# Altium PCB MCD_Rev2.PcbDoc (part 1 of 2)
Units mm, origin at the board's own origin, x right, y up, seen from the top; angles counter-clockwise.
Board outline 196.3 x 114.66 mm, 2 copper layers (F.Cu, B.Cu); 76 components, 120 nets, 473 pads, 223 vias.
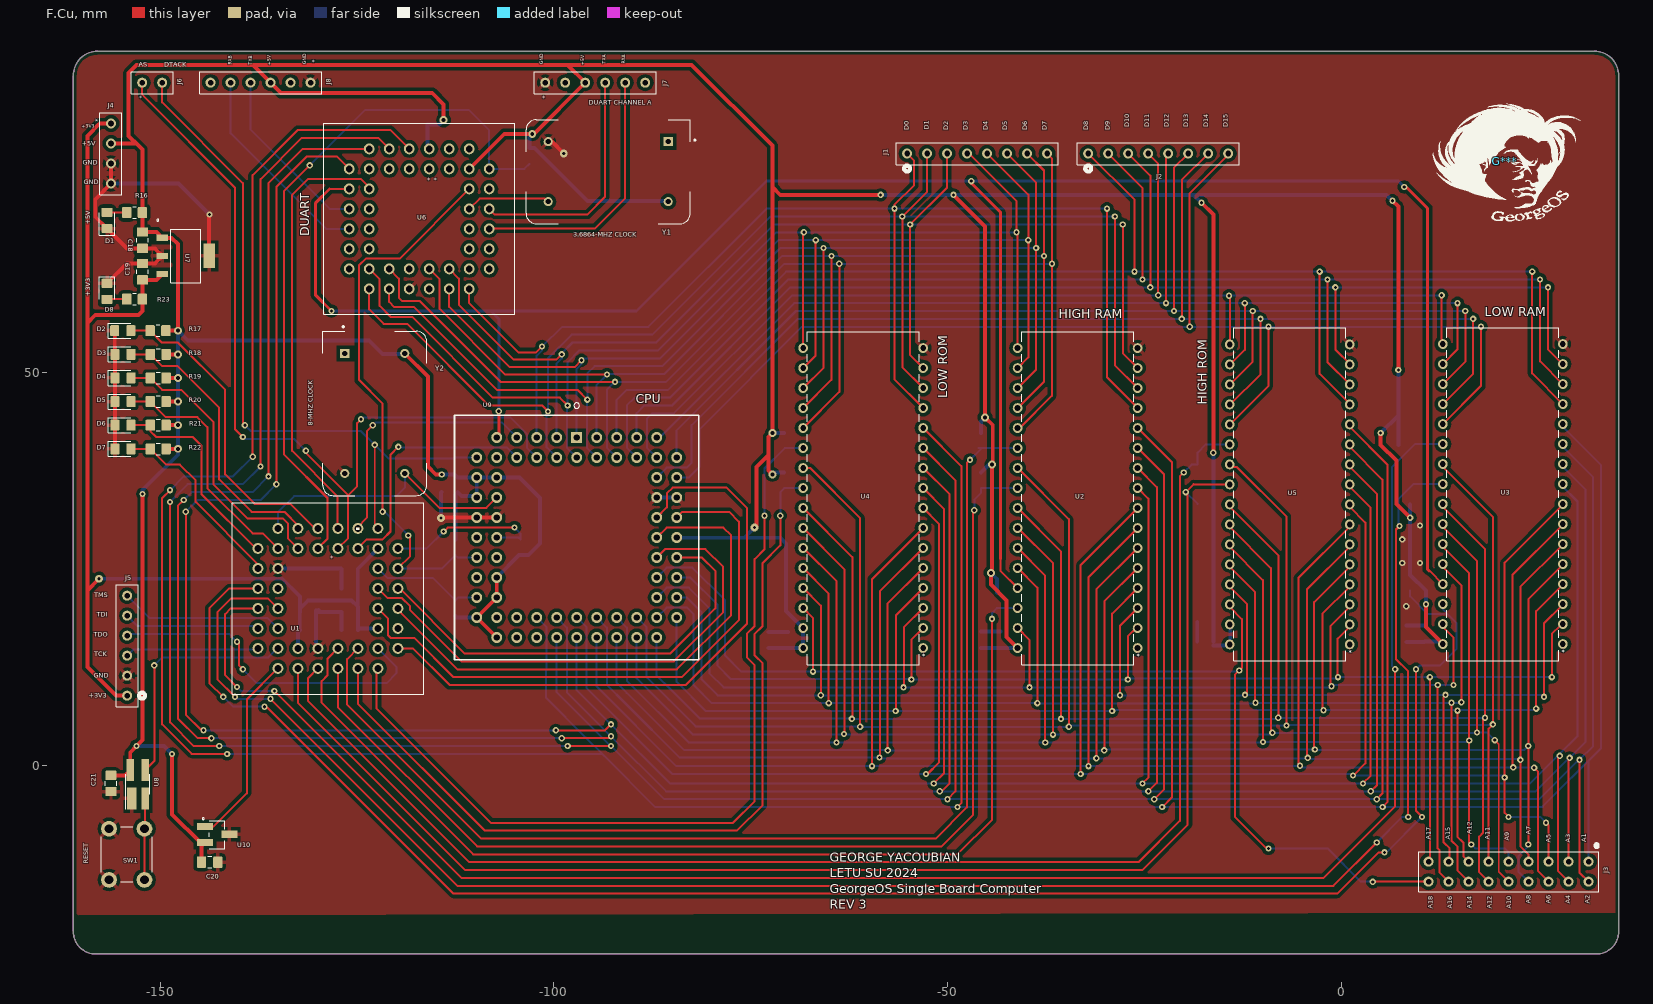
[diagram p0: F.Cu view]
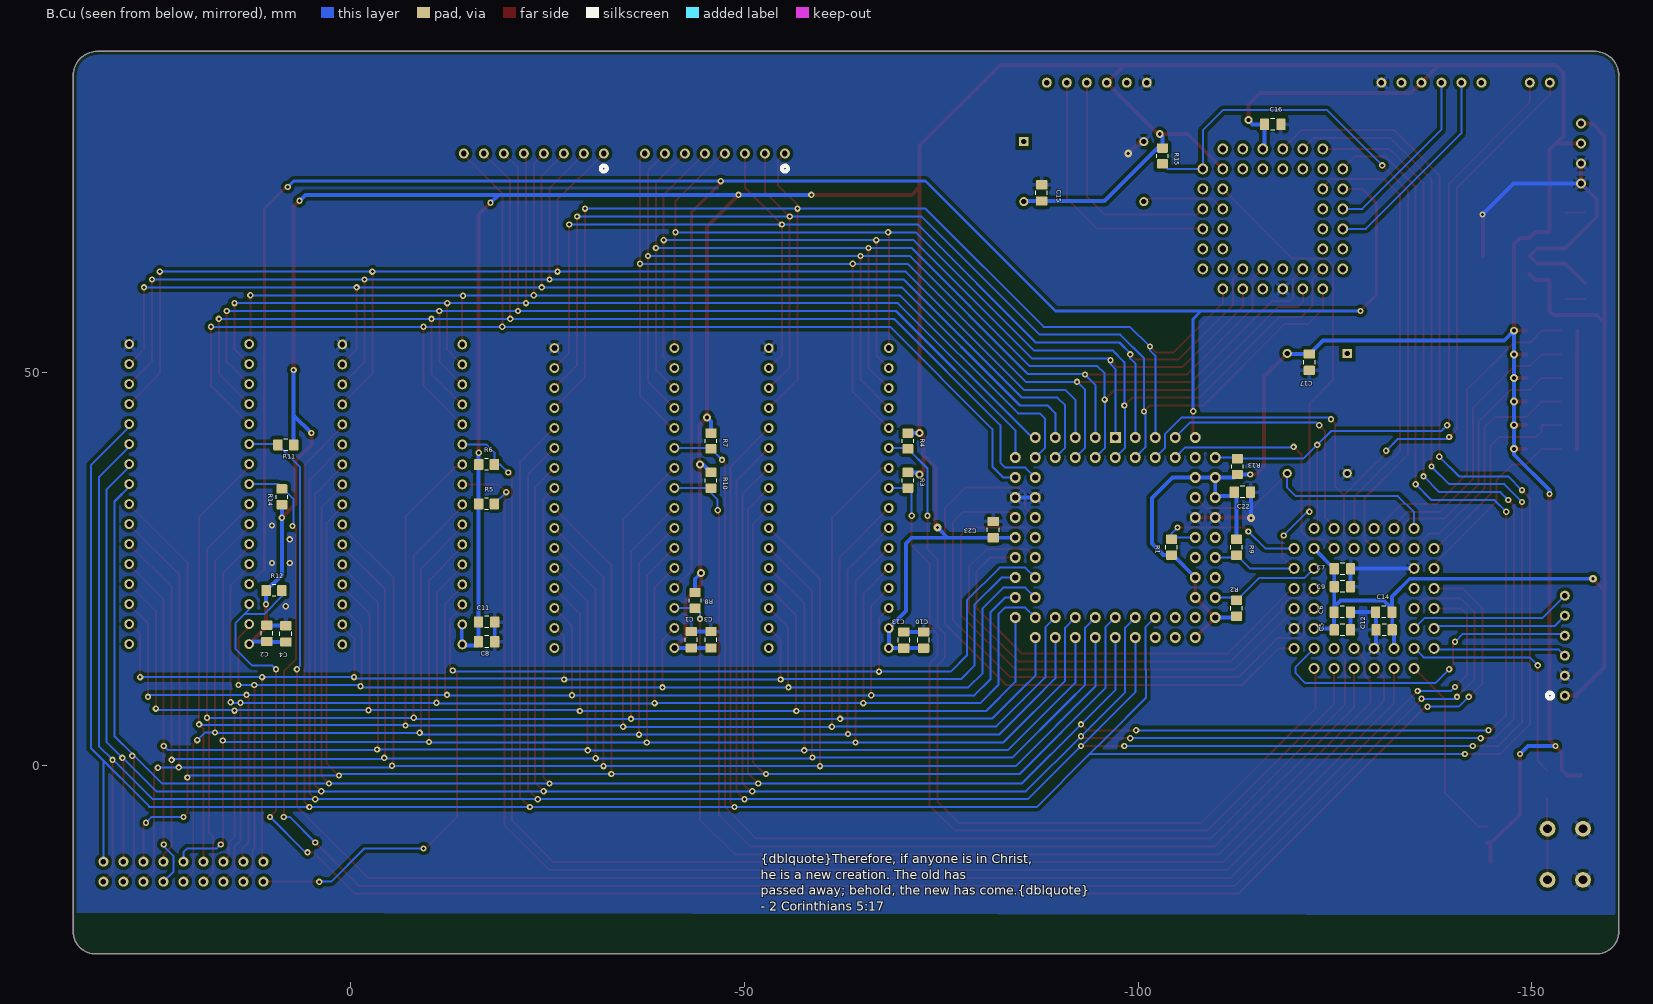
[diagram p1: B.Cu view, seen from below]

## Layer stack, top to bottom
F.Mask: solder mask 0.0102, Solder Resist, Dk 3.5
F.Cu: signal copper 0.0356
Dielectric 1: dielectric 0.32, FR-4, Dk 4.8
B.Cu: signal copper 0.0356
B.Mask: solder mask 0.0102, Solder Resist, Dk 3.5

## Board outline
-161.05,-21.05 ccw(c-158.19,-21.05) -157.95,-23.9 32.15,-23.9 ccw(c32.39,-21.05) 35.25,-21.05 35.25,87.65 ccw(c32.15,87.65) 32.15,90.75 -157.95,90.75 ccw(c-157.95,87.65) -161.05,-21.05

## Design rules (kind name [scope] priority, off if disabled: settings)
Clearance "Clearence 0.42_Polygon" [InNamedPolygon('F.Cu-GND') OR InNamedPolygon('B.Cu-GND')] p1: gap=0.42 ignorepadtopadclearanceinfootprint=FALSE
MinimumSolderMaskSliver [All] p1: minsoldermaskwidth=0
PolygonConnect Polygon_B.Cu-GND_ConnectDirect [IsNamedPolygon('B.Cu-GND') vs IsVia] p1: connectstyle=Direct reliefconductorwidth=0.254 reliefentries=4 polygonreliefangle="90 Angle" airgapwidth=0.254
PolygonConnect Polygon_B.Cu-GND_ConnectRelief45 [IsNamedPolygon('B.Cu-GND') vs (IsThruPin or IsSMTPin) and (PadShape_AllLayers = 'Round')] p2: connectstyle=Relief reliefconductorwidth=0.5 reliefentries=4 polygonreliefangle="45 Angle" airgapwidth=0.4
PolygonConnect Polygon_B.Cu-GND_ConnectRelief90 [IsNamedPolygon('B.Cu-GND') vs (IsThruPin or IsSMTPin) and (PadShape_AllLayers <> 'Round')] p3: connectstyle=Relief reliefconductorwidth=0.5 reliefentries=4 polygonreliefangle="90 Angle" airgapwidth=0.4
PolygonConnect Polygon_F.Cu-GND_ConnectDirect [IsNamedPolygon('F.Cu-GND') vs IsVia] p4: connectstyle=Direct reliefconductorwidth=0.254 reliefentries=4 polygonreliefangle="90 Angle" airgapwidth=0.254
PolygonConnect Polygon_F.Cu-GND_ConnectRelief45 [IsNamedPolygon('F.Cu-GND') vs (IsThruPin or IsSMTPin) and (PadShape_AllLayers = 'Round')] p5: connectstyle=Relief reliefconductorwidth=0.5 reliefentries=4 polygonreliefangle="45 Angle" airgapwidth=0.4
PolygonConnect Polygon_F.Cu-GND_ConnectRelief90 [IsNamedPolygon('F.Cu-GND') vs (IsThruPin or IsSMTPin) and (PadShape_AllLayers <> 'Round')] p6: connectstyle=Relief reliefconductorwidth=0.5 reliefentries=4 polygonreliefangle="90 Angle" airgapwidth=0.4
RoutingVias [All] p1: holewidth=0.711 width=1.27 viastyle="Through Hole" minholewidth=0.711 minwidth=1.27 maxholewidth=0.711 maxwidth=1.27
SilkToSilkClearance [All] p1: silktosilkclearance=0
SilkToSolderMaskClearance [IsPad] p1: minsilkscreentomaskgap=0 clearancetoexposedcopper=TRUE
SolderMaskExpansion [All] p1: expansion=0.102 istentingtop=FALSE
Width [All] p1: maxlimit=10 minlimit=0.254 preferedwidth=0.254 minimp=50.000000 maximp=50.000000 favimp=50.000000
27 further rules are at their usual default settings.

## Components (designator, comment, footprint, x,y, rotation, side; value= is the part's Value field where it differs from the comment)
C1 "0u1" C_0805_2012Metric_Pad1.18x1.45mm_HandSolder#1 -43.25,16 r270 bottom
C2 "0u1" C_0805_2012Metric_Pad1.18x1.45mm_HandSolder#1 10.65,16.813 r270 bottom
C3 "0u01" C_0805_2012Metric_Pad1.18x1.45mm_HandSolder#1 -45.75,16 r270 bottom
C4 "0u01" C_0805_2012Metric_Pad1.18x1.45mm_HandSolder#1 8.25,16.75 r270 bottom
C5 "0u01" C_0805_2012Metric_Pad1.18x1.45mm_HandSolder#1 -125.95,17.25 r0 bottom
C6 "0u1" C_0805_2012Metric_Pad1.18x1.45mm_HandSolder#1 -125.928,19.5 r0 bottom
C7 "0u01" C_0805_2012Metric_Pad1.18x1.45mm_HandSolder#1 -125.95,25 r0 bottom
C8 "0u1" C_0805_2012Metric_Pad1.18x1.45mm_HandSolder#1 -17.25,15.75 r0 bottom
C9 "0u1" C_0805_2012Metric_Pad1.18x1.45mm_HandSolder#1 -125.95,22.75 r0 bottom
C10 "0u1" C_0805_2012Metric_Pad1.18x1.45mm_HandSolder#1 -72.75,15.963 r270 bottom
C11 "0u01" C_0805_2012Metric_Pad1.18x1.45mm_HandSolder#1 -17.25,18.25 r0 bottom
C12 "0u01" C_0805_2012Metric_Pad1.18x1.45mm_HandSolder#1 -131.237,17.25 r180 bottom
C13 "0u01" C_0805_2012Metric_Pad1.18x1.45mm_HandSolder#1 -70.25,15.963 r270 bottom
C14 "0u1" C_0805_2012Metric_Pad1.18x1.45mm_HandSolder#1 -131.2,19.5 r180 bottom
C15 "0u1" C_0805_2012Metric_Pad1.18x1.45mm_HandSolder#1 -87.75,72.75 r270 bottom
C16 "0u1" C_0805_2012Metric_Pad1.18x1.45mm_HandSolder#1 -117.1,81.45 r0 bottom
C17 "0u1" C_0805_2012Metric_Pad1.18x1.45mm_HandSolder#1 -121.75,51.25 r90 bottom
C18 "4u7" C_0805_2012Metric_Pad1.18x1.45mm_HandSolder#2 -152.25,66.75 r270 top
C19 "4u7" C_0805_2012Metric_Pad1.18x1.45mm_HandSolder#2 -152.25,62.75 r90 top
C20 "0u1" C_0805_2012Metric_Pad1.18x1.45mm_HandSolder#2 -143.712,-12.25 r0 top
C21 "0u1" C_0805_2012Metric_Pad1.18x1.45mm_HandSolder#2 -156.25,-2.25 r270 top
C22 "0u1" C_0805_2012Metric_Pad1.18x1.45mm_HandSolder#1 -113.25,34.75 r0 bottom
C23 "0u1" C_0805_2012Metric_Pad1.18x1.45mm_HandSolder#1 -81.599,29.99 r270 bottom
D1 "LED" LED_0805_2012Metric_Pad1.15x1.40mm_HandSolder -156.75,69.25 r90 top
D2 "LED" LED_0805_2012Metric_Pad1.15x1.40mm_HandSolder -154.75,55.25 r0 top
D3 "LED" LED_0805_2012Metric_Pad1.15x1.40mm_HandSolder -154.725,52.25 r0 top
D4 "LED" LED_0805_2012Metric_Pad1.15x1.40mm_HandSolder -154.725,49.25 r0 top
D5 "LED" LED_0805_2012Metric_Pad1.15x1.40mm_HandSolder -154.725,46.25 r0 top
D6 "LED" LED_0805_2012Metric_Pad1.15x1.40mm_HandSolder -154.725,43.25 r0 top
D7 "LED" LED_0805_2012Metric_Pad1.15x1.40mm_HandSolder -154.725,40.25 r0 top
D8 "LED" LED_0805_2012Metric_Pad1.15x1.40mm_HandSolder -156.75,60.25 r270 top
G*** "LOGO" LOGO 20.75,76.75 r0 top
J1 "DBUS_LOW" CON8_1X8_TU_HTS_SAI -46.25,77.75 r0 top
J2 "DBUS_HIGH" CON8_1X8_TU_HTS_SAI -23.25,77.75 r0 top
J3 "ABUS" CON18_2X9_TU_HTS_SAI 21.25,-13.451 r180 top
J4 "POWER" CON4_1X4_TU_HTS_SAI -156.25,77.75 r270 top
J5 "JTAG" CON6_1X6_TU_HTS_SAI -154.2,15.25 r90 top
J6 "Conn_01x02_Male" CON2_1X2_TU_HTS_SAI -151.02,86.75 r0 top
J7 "DUART A" CON6_1X6_TU_HTS_SAI -94.75,86.75 r0 top
J8 "DUART B" CON6_1X6_TU_HTS_SAI -137.25,86.75 r180 top
R1 "4k7" R_0805_2012Metric_Pad1.20x1.40mm_HandSolder#1 -104.25,27.75 r270 bottom
R2 "4k7" R_0805_2012Metric_Pad1.20x1.40mm_HandSolder#1 -112.5,20 r270 bottom
R3 "4k7" R_0805_2012Metric_Pad1.20x1.40mm_HandSolder#1 -70.75,36.25 r90 bottom
R4 "4k7" R_0805_2012Metric_Pad1.20x1.40mm_HandSolder#1 -70.75,41.25 r90 bottom
R5 "4k7" R_0805_2012Metric_Pad1.20x1.40mm_HandSolder#1 -17.25,33.25 r0 bottom
R6 "4k7" R_0805_2012Metric_Pad1.20x1.40mm_HandSolder#1 -17.25,38.25 r0 bottom
R7 "4k7" R_0805_2012Metric_Pad1.20x1.40mm_HandSolder#1 -45.75,41.25 r90 bottom
R8 "4k7" R_0805_2012Metric_Pad1.20x1.40mm_HandSolder#1 -43.75,21 r90 bottom
R9 "4k7" R_0805_2012Metric_Pad1.20x1.40mm_HandSolder#1 -112.5,27.75 r90 bottom
R10 "4k7" R_0805_2012Metric_Pad1.20x1.40mm_HandSolder#1 -45.75,36.25 r90 bottom
R11 "4k7" R_0805_2012Metric_Pad1.20x1.40mm_HandSolder#1 8.25,40.75 r180 bottom
R12 "4k7" R_0805_2012Metric_Pad1.20x1.40mm_HandSolder#1 9.75,22.25 r0 bottom
R13 "4k7" R_0805_2012Metric_Pad1.20x1.40mm_HandSolder#1 -112.599,37.99 r270 bottom
R14 "4k7" R_0805_2012Metric_Pad1.20x1.40mm_HandSolder#1 8.75,34.15 r270 bottom
R15 "4k7" R_0805_2012Metric_Pad1.20x1.40mm_HandSolder#1 -103.1,77.45 r90 bottom
R16 "1k" R_0805_2012Metric_Pad1.20x1.40mm_HandSolder#2 -153.25,70.25 r180 top
R17 "1k" R_0805_2012Metric_Pad1.20x1.40mm_HandSolder#2 -150.275,55.25 r180 top
R18 "1k" R_0805_2012Metric_Pad1.20x1.40mm_HandSolder#2 -150.25,52.25 r180 top
R19 "1k" R_0805_2012Metric_Pad1.20x1.40mm_HandSolder#2 -150.25,49.25 r180 top
R20 "1k" R_0805_2012Metric_Pad1.20x1.40mm_HandSolder#2 -150.25,46.25 r180 top
R21 "1k" R_0805_2012Metric_Pad1.20x1.40mm_HandSolder#2 -150.25,43.25 r180 top
R22 "1k" R_0805_2012Metric_Pad1.20x1.40mm_HandSolder#2 -150.25,40.25 r180 top
R23 "1k" R_0805_2012Metric_Pad1.20x1.40mm_HandSolder#2 -153.25,59.25 r180 top
SW1 "SW_Push" SW_PUSH_6mm -156.5,-14.5 r90 top
U1 "XC9572XL-PC44" TO_11B1-RK-TP_3MM -127.43,27.6 r0 top
U2 "AS6C1008-55PCN" PDIP32_PH_SST_MCH -25.86,14.95 r180 top
U3 "AS6C1008-55PCN" PDIP32_PH_SST_MCH 28.14,15.45 r180 top
U4 "SST39SF020A-70-4C-PHE" PDIP32_PH_SST_MCH -53.1,14.95 r180 top
U5 "SST39SF020A-70-4C-PHE" PDIP32_PH_SST_MCH 1.07,15.41 r180 top
U6 "XR68C681CJ-F" TO_11B1-RK-TP_3MM -115.83,75.8 r0 top
U7 "AP2114HA-3.3TRG1" SOT-223_DIO-L -146.75,64.75 r270 top
U8 "MAX6816EUS_T" SOT-143_Handsoldering -152.85,-2.35 r90 top
U9 "MC68000FN" 3M_8468-11B1-RK-TP -97.099,28.99 r0 top
U10 "STM1001LWX6F" SOT-23_STM-L -142.75,-8.75 r270 top
Y1 "ECS-100AX-036" OSC_ECS-100AX-036 -93.1,75.45 r180 top
Y2 "ECS-100AX-080" OSC_ECS-100AX-080 -122.75,44.75 r270 top

## Footprints (in the part's own frame and the unit in brackets; to place one, negate y for a bottom-side part, rotate by r counter-clockwise, add the part's x,y. Pads: shape width x height; smd on the part's side, far side on the other; paste and mask are expansions set on the pad)
3M_8468-11B1-RK-TP [mm]
  rect 1.4x1.4 hole 0.8 paste-2539.97 mask+0.102: 1(0,12.7)
  round 1.4 hole 0.8 paste-2539.97 mask+0.102: 2(0,10.16) 3(-2.54,12.7) 4(-2.54,10.16) 5(-5.08,12.7) 6(-5.08,10.16) 7(-7.62,12.7) 8(-7.62,10.16) 9(-10.16,12.7) 10(-12.7,10.16) 11(-10.16,10.16) 12(-12.7,7.62) 13(-10.16,7.62) 14(-12.7,5.08) 15(-10.16,5.08) 16(-12.7,2.54) 17(-10.16,2.54) 18(-12.7,0) 19(-10.16,0) 20(-12.7,-2.54) 21(-10.16,-2.54) 22(-12.7,-5.08) 23(-10.16,-5.08) 24(-12.7,-7.62) 25(-10.16,-7.62) 26(-12.7,-10.16) 27(-10.16,-12.7) 28(-10.16,-10.16) 29(-7.62,-12.7) 30(-7.62,-10.16) 31(-5.08,-12.7) 32(-5.08,-10.16) 33(-2.54,-12.7) 34(-2.54,-10.16) 35(0,-12.7) 36(0,-10.16) 37(2.54,-12.7) 38(2.54,-10.16) 39(5.08,-12.7) 40(5.08,-10.16) 41(7.62,-12.7) 42(7.62,-10.16) 43(10.16,-12.7) 44(12.7,-10.16) 45(10.16,-10.16) 46(12.7,-7.62) 47(10.16,-7.62) 48(12.7,-5.08) 49(10.16,-5.08) 50(12.7,-2.54) 51(10.16,-2.54) 52(12.7,0) 53(10.16,0) 54(12.7,2.54) 55(10.16,2.54) 56(12.7,5.08) 57(10.16,5.08) 58(12.7,7.62) 59(10.16,7.62) 60(12.7,10.16) 61(10.16,12.7) 62(10.16,10.16) 63(7.62,12.7) 64(7.62,10.16) 65(5.08,12.7) 66(5.08,10.16) 67(2.54,12.7) 68(2.54,10.16)
  silkscreen extent -15.53,-15.53 15.53,17.1
C_0805_2012Metric_Pad1.18x1.45mm_HandSolder#1 [mm]
  rrect21% 1.175x1.45 smd mask+0: 1(1.038,0) 2(-1.038,0)
  silkscreen extent -0.26,-0.73 0.26,0.73
C_0805_2012Metric_Pad1.18x1.45mm_HandSolder#2 [mm]
  rrect21% 1.175x1.45 smd mask+0: 1(-1.038,0) 2(1.038,0)
  silkscreen extent -0.26,-0.73 0.26,0.73
CON2_1X2_TU_HTS_SAI [mil]
  round 50 hole 28 paste-99999 mask+0: 1(-50,0) 2(50,0)
  silkscreen extent -105,-55 105,55
CON4_1X4_TU_HTS_SAI [mil]
  round 50 hole 28 paste-99999 mask+0: 1(-150,0) 2(-50,0) 3(50,0) 4(150,0)
  silkscreen extent -205,-55 205,55
CON6_1X6_TU_HTS_SAI [mil]
  round 50 hole 28 paste-99999 mask+0: 1(-250,0) 2(-150,0) 3(-50,0) 4(50,0) 5(150,0) 6(250,0)
  silkscreen extent -305,-90 305,55
CON8_1X8_TU_HTS_SAI [mil]
  round 50 hole 28 paste-99999 mask+0: 1(-350,0) 2(-250,0) 3(-150,0) 4(-50,0) 5(50,0) 6(150,0) 7(250,0) 8(350,0)
  silkscreen extent -405,-90 405,55
CON18_2X9_TU_HTS_SAI [mil]
  round 50 hole 28 paste-99999 mask+0: 1(-400,-50) 2(-400,50) 3(-300,-50) 4(-300,50) 5(-200,-50) 6(-200,50) 7(-100,-50) 8(-100,50) 9(0,-50) 10(0,50) 11(100,-50) 12(100,50) 13(200,-50) 14(200,50) 15(300,-50) 16(300,50) 17(400,-50) 18(400,50)
  silkscreen extent -454,-144 450,100
LED_0805_2012Metric_Pad1.15x1.40mm_HandSolder [mm]
  rrect22% 1.15x1.4 smd mask+0: 1(-1.025,0) 2(1.025,0)
  silkscreen extent -1.86,-0.96 1,0.96
LOGO [mm]
  silkscreen extent -9.12,-7.62 9.58,7.35
OSC_ECS-100AX-036 [mm]
  rect 1.158x1.158 hole 0.65 paste-2539.97 mask+0.102: 1(-7.62,-3.81)
  round 1.158 hole 0.65 paste-2539.97 mask+0.102: 7(7.62,-3.81) 8(7.62,3.81) 14(-7.62,3.81)
  silkscreen extent -11.1,-6.6 10.43,6.6
OSC_ECS-100AX-080 [mm]
  rect 1.158x1.158 hole 0.65 paste-2539.97 mask+0.102: 1(-7.62,-3.81)
  round 1.158 hole 0.65 paste-2539.97 mask+0.102: 7(7.62,-3.81) 8(7.62,3.81) 14(-7.62,3.81)
  silkscreen extent -11.1,-6.6 10.43,6.6
PDIP32_PH_SST_MCH [mil]
  round 49 hole 29 paste-99999 mask+0: 1(0,0) 2(0,-100) 3(0,-200) 4(0,-300) 5(0,-400) 6(0,-500) 7(0,-600) 8(0,-700) 9(0,-800) 10(0,-900) 11(0,-1000) 12(0,-1100) 13(0,-1200) 14(0,-1300) 15(0,-1400) 16(0,-1500) 17(600,-1500) 18(600,-1400) 19(600,-1300) 20(600,-1200) 21(600,-1100) 22(600,-1000) 23(600,-900) 24(600,-800) 25(600,-700) 26(600,-600) 27(600,-500) 28(600,-400) 29(600,-300) 30(600,-200) 31(600,-100) 32(600,0)
  silkscreen extent 20,-1582 580,83
R_0805_2012Metric_Pad1.20x1.40mm_HandSolder#1 [mm]
  rrect21% 1.2x1.4 smd mask+0: 1(1,0) 2(-1,0)
  silkscreen extent -0.23,-0.73 0.23,0.73
R_0805_2012Metric_Pad1.20x1.40mm_HandSolder#2 [mm]
  rrect21% 1.2x1.4 smd mask+0: 1(-1,0) 2(1,0)
  silkscreen extent -0.23,-0.73 0.23,0.73
SOT-23_STM-L [mil]
  rect 34.6x80 smd mask+0: 1(-40,-62) 2(40,-62)
  rect 38x80 smd mask+0: 3(-2,60)
  silkscreen extent -85,-75 70,37
SOT-143_Handsoldering [mm]
  rect 2.8x1.2 smd mask+0: 1(-1.8,0.77)
  rect 2.8x1 smd mask+0: 2(-1.8,-0.95) 3(1.8,-0.95) 4(1.8,0.95)
  silkscreen extent -3.15,-1.55 1.25,1.55
SOT-223_DIO-L [mm]
  rect 0.8x1.456 smd mask+0: 1(-2.3,-2.974) 2(0,-2.974) 3(2.3,-2.974)
  rect 3.1x1.456 smd mask+0: 4(0,2.974)
  silkscreen extent -4.67,-3.68 3.4,1.9
SW_PUSH_6mm [mm]
  round 2 hole 1.1 paste-2539.97 mask+0: 1(0,0) 1(6.5,0) 2(0,-4.5) 2(6.5,-4.5)
  silkscreen extent -0.25,-5.5 6.75,1
TO_11B1-RK-TP_3MM [mil]
  round 54 hole 34 paste-99999 mask+0: 1(0,0) 2(-100,100) 3(-100,0) 4(-200,100) 5(-200,0) 6(-300,100) 7(-400,0) 8(-300,0) 9(-400,-100) 10(-300,-100) 11(-400,-200) 12(-300,-200) 13(-400,-300) 14(-300,-300) 15(-400,-400) 16(-300,-400) 17(-400,-500) 18(-300,-600) 19(-300,-500) 20(-200,-600) 21(-200,-500) 22(-100,-600) 23(-100,-500) 24(0,-600) 25(0,-500) 26(100,-600) 27(100,-500) 28(200,-600) 29(300,-500) 30(200,-500) 31(300,-400) 32(200,-400) 33(300,-300) 34(200,-300) 35(300,-200) 36(200,-200) 37(300,-100) 38(200,-100) 39(300,0) 40(200,100) 41(200,0) 42(100,100) 43(100,0) 44(0,100)
  silkscreen extent -528,-728 428,228

## Part data
C1 C2 C3 C4 C5 C6 C7 C8 C9 C10 C11 C12 C13 C14 C15 C16 C17 C18 C19 C20 C21 C22 C23: library part C_0805_2012Metric_Pad1.18x1.45mm_HandSolder, "Capacitor SMD 0805 (2012 Metric), square (rectangular) end terminal, IPC_7351 nominal with elongated pad for handsoldering. (Body size source: IPC-SM-782 page 76, https://www.pcb-3d.com/wordpress/wp-content/uploads/ipc-sm-782a_amendment_1_and_2.pdf, https://docs.google.com/spreadsheets/d/1BsfQQcO9C6DZCsRaXUlFlo91Tg2WpOkGARC1WS5S8t0/edit?usp=sharing), generated with kicad-footprint-generator", Sheetfile=MCD.kicad_sch
D1 D2 D3 D4 D5 D6 D7 D8: library part LED_0805_2012Metric_Pad1.15x1.40mm_HandSolder, "LED SMD 0805 (2012 Metric), square (rectangular) end terminal, IPC_7351 nominal, (Body size source: https://docs.google.com/spreadsheets/d/1BsfQQcO9C6DZCsRaXUlFlo91Tg2WpOkGARC1WS5S8t0/edit?usp=sharing), generated with kicad-footprint-generator", Sheetfile=MCD.kicad_sch
J1 J2: library part CON8_1X8_TU_HTS_SAI, Sheetfile=MCD.kicad_sch
J3: library part CON18_2X9_TU_HTS_SAI, Sheetfile=MCD.kicad_sch
J4: library part CON4_1X4_TU_HTS_SAI, Sheetfile=MCD.kicad_sch
J5 J7 J8: library part CON6_1X6_TU_HTS_SAI, Sheetfile=MCD.kicad_sch
J6: library part CON2_1X2_TU_HTS_SAI, Sheetfile=MCD.kicad_sch
R1 R2 R3 R4 R5 R6 R7 R8 R9 R10 R11 R12 R13 R14 R15 R16 R17 R18 R19 R20 R21 R22 R23: library part R_0805_2012Metric_Pad1.20x1.40mm_HandSolder, "Resistor SMD 0805 (2012 Metric), square (rectangular) end terminal, IPC_7351 nominal with elongated pad for handsoldering. (Body size source: IPC-SM-782 page 72, https://www.pcb-3d.com/wordpress/wp-content/uploads/ipc-sm-782a_amendment_1_and_2.pdf), generated with kicad-footprint-generator", Sheetfile=MCD.kicad_sch
SW1: library part SW_PUSH_6mm, "https://www.omron.com/ecb/products/pdf/en-b3f.pdf", Sheetfile=MCD.kicad_sch
U1 U6: library part TO_11B1-RK-TP_3MM, Sheetfile=MCD.kicad_sch
U2 U3: library part PDIP32_PH_SST_MCH, Manufacturer="Alliance Memory, Inc.", MAXIMUM_PACKAGE_HEIGHT="4.191 mm", SNAPEDA_PACKAGE_ID=10893, PARTREV=v1.0, SNAPEDA_PN=AS6C1008-55PCN, STANDARD="IPC 7351B", Sheetfile=MCD.kicad_sch
U4 U5: library part PDIP32_PH_SST_MCH, Sheetfile=MCD.kicad_sch
U7: library part SOT-223_DIO-L, Sheetfile=MCD.kicad_sch
U8: library part SOT-143_Handsoldering, "SOT-143 Handsoldering", Manufacturer="Maxim Integrated", Package=SOT192P237X122-4N, Sheetfile=MCD.kicad_sch
U9: library part 3M_8468-11B1-RK-TP, Sheetfile=MCD.kicad_sch
U10: library part SOT-23_STM-L, Sheetfile=MCD.kicad_sch
Y1: library part OSC_ECS-100AX-036, Manufacturer="ECS Inc.", STANDARD="MANUFACTURER RECOMMENDATIONS", Sheetfile=MCD.kicad_sch
Y2: library part OSC_ECS-100AX-080, Manufacturer="ECS Inc.", STANDARD="MANUFACTURER RECOMMENDATIONS", Sheetfile=MCD.kicad_sch

## Via types
v1: diameter 0.8, hole 0.4, F.Cu to B.Cu, tented both sides, 206 vias
v2: diameter 1, hole 0.5, F.Cu to B.Cu, tented both sides, 13 vias
v3: diameter 1, hole 0.4, F.Cu to B.Cu, tented both sides, 4 vias

## Nets (pads, with @x,y where several pads share a name; then routed paths per layer and width w, separated by ;. In a path a pad name is that pad's centre, name@x,y a point inside that pad or via, vN(x,y) a via of type N, cw(c..) or ccw(c..) an arc to the next point about the centre after c; other vN are vias at no path point)
3V3_LED: D8.2 R23.2 | length 2.5
  F.Cu w0.254: D8.2@-156.75,59.225 -156.725,59.25 R23.2@-154.25,59.25
5V_LED: D1.2 R16.2 | length 2.5
  F.Cu w0.254: D1.2@-156.75,70.275 -156.725,70.25 R16.2@-154.25,70.25
+3V3: C5.1 C6.1 C7.1 C9.1 C12.1 C14.1 C19.1 J4.1 J5.1 R23.1 U1.21 U1.32 U1.41 U7.3 | length 154.7
  F.Cu w0.5: v3(-157.75,23.75) -159.25,22.25 -159.25,24 ; J4.1@-156.25,81.56 -157.69,81.56 -159.25,80 -159.25,54.25 ; J5.1@-154.2,8.9 -155.6,8.9 -159.25,12.55 -159.25,24 ; U7.3@-149.724,62.45 -150.462,61.713 C19.1@-152.25,61.713 R23.1@-152.25,59.25 -152.25,57.75 -152.75,57.25 -158.25,57.25 -159.25,56.25 -159.25,54.25 ; -159.25,24 -159.25,54.25
  B.Cu w0.5: v3(-157.75,23.75) -134.5,23.75 -132.238,21.488 C14.1@-132.238,19.5 -132.238,19.963 -131.2,21 -125.7,21 -124.89,20.19 C6.1@-124.89,19.5 -124.913,19.523 -124.913,22.5 C7.1@-124.912,25 -122.35,27.563 U1.41@-122.35,27.6 ; U1.21@-132.51,14.9 -132.51,16.977 C12.1@-132.238,17.25 ; C12.1@-132.275,17.25 C14.1@-132.275,19.75 ; C6.1@-124.89,19.75 -124.89,17.25 -124.7,17.44 U1.32@-122.577,17.44
+5V: C1.1 C2.1 C3.1 C4.1 C8.1 C10.1 C11.1 C13.1 C15.1 C16.1 C17.1 C18.1 C20.1 C21.1 C22.1 C23.1 J4.2 J7.3 J8.3 R1.1 R2.1 R3.1 R4.1 R5.1 R6.1 R7.1 R8.1 R9.1 R10.1 R11.1 R12.1 R13.1 R14.1 R15.1 R16.1 R17.1 R18.1 R19.1 R20.1 R21.1 R22.1 U2.32 U3.32 U4.31 U4.32 U5.31 U5.32 U6.41 U6.44 U7.1 U8.4 U9.12 U9.13 U9.14 U9.23 U9.25 U9.26 U9.27 U9.52 U10.2 Y1.14 Y2.14 | length 771.7
  F.Cu w0.5: C21.1@-156.25,-1.212 -156.212,-1.25 -154.5,-1.25 U8.4@-153.8,-0.55 -153.8,1.7 v1(-153,2.5) -152.25,3.25 v1(-152.25,34.5) ; J4.2@-156.25,79.02 -153.02,79.02 -152.75,78.75 ; R17.1@-149.275,55.25 v2(-147.75,55.25) -147.75,66.25 -148.55,67.05 U7.1@-149.724,67.05 -150.462,67.787 C18.1@-152.25,67.788 R16.1@-152.25,70.25 -152.25,78.25 -152.75,78.75 ; R22.1@-149.25,40.25 v2(-147.75,40.25) ; R21.1@-149.25,43.25 v2(-147.75,43.25) ; R20.1@-149.25,46.25 v2(-147.75,46.25) ; R19.1@-149.25,49.25 v2(-147.75,49.25) ; R18.1@-149.25,52.25 v2(-147.75,52.25) ; v1(-148.5,1.5) -148.5,-6.167 -144.901,-9.766 U10.2@-144.325,-9.766 -144.75,-10.191 C20.1@-144.75,-12.25 ; Y2.14@-118.94,52.37 -116,49.43 -116,38 -115,37 v1(-114.25,37) ; v2(-114,82) -114,84 -115.445,85.445 -134.675,85.445 J8.3@-135.98,86.75 -138.23,89 -138.75,89 ; U6.41@-110.75,75.8 -106.3,80.25 v2(-102.75,80.25) -102.52,80.25 J7.3@-96.02,86.75 -98.27,89 ; U9.27@-107.259,16.29 U9.26@-109.799,18.83 U9.25@-107.259,21.37 U9.23@-107.259,23.91 ; v3(-74.5,30.25) -74.25,30.5 -74.25,37.95 -72.75,39.45 ; v2(-72.25,37) -72.75,37.5 -72.75,39.45 ; -72.25,73.5 -71.25,72.5 v1(-58.5,72.5) ; v1(-49.25,72.5) -45.25,68.5 v2(-45.25,44.25) -44.26,43.26 -44.26,38.35 v2(-44.36,38.25) -44.36,24.64 v2(-44.5,24.5) -44.5,23 -42.5,21 -42.5,16.35 U2.32@-41.1,14.95 ; v1(-17.75,71.5) -16.25,70 v1(-16.25,39.75) ; v1(5,42.25) 5,40.75 7,38.75 7,33.25 v1(8.75,31.5) ; v1(6.5,71.75) 7.25,71 v1(7.25,50.25) ; v1(10.764,20.514) 10.75,20.5 10.75,17.6 U3.32@12.9,15.45 ; -152.75,78.75 -154,80 -154,88 -153,89 -138.75,89 ; -138.75,89 -98.27,89 ; -98.27,89 -82.5,89 -72.25,78.75 -72.25,72.75 v2(-72.25,42.25) -72.75,41.75 -72.75,39.45
  B.Cu w0.5: v1(-153,2.5) -149.5,2.5 v1(-148.5,1.5) ; v1(-152.25,34.5) -152.25,35 -147.75,39.5 v2(-147.75,40.25) v2(-147.75,43.25) v2(-147.75,46.25) v2(-147.75,49.25) v2(-147.75,52.25) v2(-147.75,55.25) -146.5,54 -123.462,54 C17.1@-121.75,52.288 -119.023,52.288 Y2.14@-118.94,52.37 ; U6.44@-115.83,78.34 -116.063,78.572 C16.1@-116.062,81.45 -114.55,81.45 v2(-114,82) ; v1(-114.25,37) -114.24,36.99 R13.1@-112.599,36.99 -112.219,36.61 U9.12@-109.799,36.61 ; R2.1@-112.5,19 -112.33,18.83 U9.26@-109.799,18.83 ; R9.1@-112.5,28.75 -112.5,34.463 C22.1@-112.212,34.75 -111.712,34.25 -109.979,34.25 U9.14@-109.799,34.07 U9.12@-109.799,36.61 ; U9.23@-107.259,23.91 -104.419,26.75 R1.1@-104.25,26.75 -103.25,26.75 -101.75,28.25 -101.75,34 -104.36,36.61 U9.13@-107.259,36.61 U9.12@-109.799,36.61 ; v2(-102.75,80.25) -103.1,79.9 R15.1@-103.1,78.45 -102.45,78.45 -95.713,71.713 C15.1@-87.75,71.713 -85.553,71.713 Y1.14@-85.48,71.64 ; U9.52@-84.399,28.99 -84.362,28.952 C23.1@-81.599,28.952 -76.298,28.952 ; v3(-74.5,30.25) -75.797,28.952 -76.298,28.952 ; C10.1@-72.75,14.925 C13.1@-70.25,14.925 -68.365,14.925 U4.32@-68.34,14.95 U4.31@-68.34,17.49 -70.5,19.65 -70.5,28.25 -71.202,28.952 -76.298,28.952 ; v2(-72.25,37) -72,37.25 R3.1@-70.75,37.25 ; v2(-72.25,42.25) R4.1@-70.75,42.25 ; v1(-58.5,72.5) v1(-49.25,72.5) -18.75,72.5 ; C3.1@-45.75,14.962 C1.1@-43.25,14.962 -43.238,14.95 U2.32@-41.1,14.95 ; R10.1@-45.75,37.25 -44.75,38.25 v2(-44.36,38.25) ; R7.1@-45.75,42.25 -45.75,43.75 v2(-45.25,44.25) ; v2(-44.5,24.5) -43.75,23.75 R8.1@-43.75,22 ; v1(-17.75,71.5) -18.75,72.5 ; C8.1@-16.25,15.288 -14.222,15.288 -14.1,15.41 U5.31@-14.1,17.95 ; v1(-16.25,39.75) R6.1@-16.25,38.25 R5.1@-16.25,33.25 -16.212,33.213 C11.1@-16.212,18.25 C8.1@-16.212,15.75 ; v1(5,42.25) 7.25,44.5 ; v1(6.5,71.75) 5.75,72.5 -18.75,72.5 ; R11.1@7.25,40.75 7.25,43.75 v1(7.25,50.25) ; C4.1@8.25,15.712 10.587,15.713 C2.1@10.65,15.775 12.575,15.775 U3.32@12.9,15.45 ; R14.1@8.75,33.15 v1(8.75,31.5) 8.75,24.25 R12.1@10.75,22.25 10.764,22.236 v1(10.764,20.514)
A1: J3.1 U2.12 U3.12 U4.12 U5.12 U6.2 U9.32 | length 521.9
  F.Cu w0.254: v1(-148.75,35) -149.75,34 -149.75,5.25 -146,1.5 v1(-141.5,1.5) ; v1(-138.25,39.25) -138.25,75 -132.5,80.75 -120.78,80.75 U6.2@-118.37,78.34 ; U4.12@-53.1,42.89 -48.253,38.043 -48.253,-4.753 v1(-48.75,-5.25) ; U2.12@-25.86,42.89 -21.5,38.53 -21.5,-4 v1(-22.75,-5.25) ; U5.12@1.053,43.043 5.9,38.196 5.9,-4.6 v1(5.25,-5.25)
  B.Cu w0.25: J3.1@31.41,-12.181 31.41,0.66 32.75,2
  B.Cu w0.254: v1(-148.75,35) -147,36.75 -140.75,36.75 v1(-138.25,39.25) ; v1(-141.5,1.5) -93.875,1.5 -93.687,1.313 ; U9.32@-102.179,18.83 -100.933,17.583 -100.933,12.225 -101,12.158 -101,8.625 -95.937,3.562 -93.687,1.313 ; U3.12@27.99,43.19 33,38.18 33,2.25 32.75,2 25.614,-5.136 25.614,-5.25 v1(5.25,-5.25) v1(-22.75,-5.25) v1(-48.75,-5.25) -87.125,-5.25 -93.687,1.313
A2: J3.2 U2.11 U3.11 U4.11 U5.11 U6.4 U9.33 | length 497
  F.Cu w0.25: v1(30.25,0.75) 30.25,-13.561 J3.2@31.41,-14.721
  F.Cu w0.254: v1(-148.75,33.5) -148.75,5.5 -145.75,2.5 v1(-142.5,2.5) ; v1(-137.25,38) -137.25,74.5 -132,79.75 -122.32,79.75 U6.4@-120.91,78.34 ; v1(-98.25,2.5) v1(-92.75,2.5) ; U4.11@-53.1,40.35 -49,36.25 -49,-3.25 v1(-50,-4.25) ; U2.11@-25.86,40.35 -22.5,36.99 -22.5,-3 v1(-23.75,-4.25) ; U5.11@1.053,40.503 5.226,36.329 5.226,-3.524 v1(4.5,-4.25)
  B.Cu w0.254: v1(-148.75,33.5) -146.5,35.75 -139.5,35.75 v1(-137.25,38) ; v1(-142.5,2.5) v1(-98.25,2.5) ; U9.33@-99.639,16.29 -99.639,9.361 -99.611,9.361 -86,-4.25 v1(-50,-4.25) v1(-23.75,-4.25) v1(4.5,-4.25) 25.157,-4.25 30.157,0.75 v1(30.25,0.75) 32,2.5 32,36.64 U3.11@27.99,40.65
A3: J3.3 U2.10 U3.10 U4.10 U5.10 U6.6 U9.34 | length 473.4
  F.Cu w0.25: J3.3@28.87,-12.181 28.87,0.87 v1(29,1)
  F.Cu w0.254: v1(-147,33.75) -147.75,33 -147.75,6 -145.25,3.5 v1(-143.5,3.5) ; v1(-136.25,36.75) -136.25,74 -131.91,78.34 U6.6@-123.45,78.34 ; v1(-99,3.5) -93,3.5 v1(-92.75,3.75) ; U4.10@-53.1,37.81 -49.75,34.46 -49.75,-2.25 -50.75,-3.25 v1(-51,-3.25) ; U2.10@-25.86,37.81 -23.426,35.376 -23.426,-2.176 v1(-24.5,-3.25) ; U5.10@1.053,37.963 4.553,34.463 4.553,-2.447 v1(3.75,-3.25)
  B.Cu w0.254: v1(-147,33.75) -146,34.75 -138.25,34.75 v1(-136.25,36.75) ; v1(-143.5,3.5) v1(-99,3.5) ; U9.34@-99.639,18.83 -98.346,17.537 -98.346,9.346 v1(-92.75,3.75) -85.75,-3.25 v1(-51,-3.25) v1(-24.5,-3.25) v1(3.75,-3.25) 24.695,-3.25 28.945,1 v1(29,1) 31,3 31,35.1 U3.10@27.99,38.11
A4: J3.4 U2.9 U3.9 U4.9 U5.9 U6.7 U9.35 | length 453
  F.Cu w0.254: v1(-146.75,32.25) -146.75,6.5 -144.75,4.5 v1(-144.5,4.5) ; v1(-135.25,35.75) -135.25,73.5 -131.356,77.394 -127.584,77.394 U6.7@-125.99,75.8 ; v1(-99.75,4.5) -93.527,4.5 -93.301,4.727 -93.273,4.727 v1(-92.75,5.25) ; U4.9@-53.1,35.27 -50.426,32.596 -50.426,-0.926 v1(-51.75,-2.25) ; U2.9@-25.86,35.27 -24.5,33.91 -24.5,-1.5 v1(-25.25,-2.25) ; U5.9@1.053,35.423 3.726,32.749 3.726,-1.274 v1(2.75,-2.25) ; v1(27.75,1.25) 27.5,1 27.5,-13.351 J3.4@28.87,-14.721
  B.Cu w0.254: v1(-146.75,32.25) -145.25,33.75 -137.25,33.75 v1(-135.25,35.75) ; v1(-144.5,4.5) v1(-99.75,4.5) ; U9.35@-97.099,16.29 -97.099,9.599 v1(-92.75,5.25) -85.25,-2.25 v1(-51.75,-2.25) -27.75,-2.25 ; v1(-25.25,-2.25) -27.75,-2.25 ; U3.9@27.99,35.57 30,33.56 30,3.75 27.75,1.5 v1(27.75,1.25) 27.5,1.25 24,-2.25 v1(2.75,-2.25) -27.75,-2.25
A5: J3.5 U2.8 U3.8 U4.8 U5.8 U9.36 | length 291.5
  F.Cu w0.25: v1(20.75,-1.5) 20.75,-6 v1(21.25,-6.5) ; v1(26,-7.25) 26.33,-7.58 J3.5@26.33,-12.181
  F.Cu w0.254: U4.8@-53.1,32.73 -51.1,30.73 -51.1,0.4 -52.55,-1.05 v1(-52.75,-1.05) ; v1(-33.1,-1.05) -33.1,25.49 U2.8@-25.86,32.73 ; U5.8@1.053,32.883 3.053,30.883 3.053,0.303 v1(1.5,-1.25) ; v1(20.75,-1.5) 20.75,25.79 U3.8@27.99,33.03
  B.Cu w0.25: v1(21.25,-6.5) 25.25,-6.5 v1(26,-7.25)
  B.Cu w0.254: U9.36@-97.099,18.83 -95.853,17.583 -95.853,9.853 -84.95,-1.05 v1(-52.75,-1.05) v1(-33.1,-1.05) 1.3,-1.05 v1(1.5,-1.25) 20.5,-1.25 v1(20.75,-1.5)
A6: J3.6 U2.7 U3.7 U4.7 U5.7 U9.37 | length 277.1
  F.Cu w0.25: v1(24.5,-0.25) 25,-0.75 25,-13.391 J3.6@26.33,-14.721
  F.Cu w0.254: v1(-59.6,-0.05) -59.6,23.69 U4.7@-53.1,30.19 ; v1(-32.1,-0.05) -32.1,23.95 U2.7@-25.86,30.19 ; v1(-5.25,0.004) -5.447,0.201 -5.447,23.843 U5.7@1.053,30.343 ; v1(21.841,-0.205) 21.75,-0.114 21.75,24.25 U3.7@27.99,30.49
  B.Cu w0.25: v1(21.841,-0.205) 21.886,-0.25 v1(24.5,-0.25)
  B.Cu w0.254: U9.37@-94.559,16.29 -94.559,10.059 -84.45,-0.05 v1(-59.6,-0.05) v1(-32.1,-0.05) -5.303,-0.05 v1(-5.25,0.004) -4.997,-0.25 21.795,-0.25 v1(21.841,-0.205)
A7: J3.7 U2.6 U3.6 U4.6 U5.6 U9.38 | length 258.7
  F.Cu w0.25: v1(22.75,0.75) 22.75,-10.25 23.79,-11.29 J3.7@23.79,-12.181
  F.Cu w0.254: v1(-58.636,1.057) -58.6,1.093 -58.6,22.15 U4.6@-53.1,27.65 ; v1(-31.1,0.95) -31.1,22.41 U2.6@-25.86,27.65 ; v1(-4.26,0.996) -4.35,1.086 -4.35,22.4 U5.6@1.053,27.803 ; v1(22.75,0.75) 22.75,22.71 U3.6@27.99,27.95
  B.Cu w0.254: U9.38@-94.559,18.83 -93.266,17.537 -93.266,10.266 -90.903,7.903 -84.057,1.057 v1(-58.636,1.057) -58.529,0.95 v1(-31.1,0.95) -4.306,0.95 v1(-4.26,0.996) -4.114,0.85 22.65,0.85 v1(22.75,0.75)
A8: J3.8 U2.5 U3.5 U4.5 U5.5 U9.39 | length 243.4
  F.Cu w0.25: v1(23.75,-10) v1(23.75,2.5)
  F.Cu w0.254: v1(-57.6,1.95) -57.6,20.61 U4.5@-53.1,25.11 ; v1(-30.1,1.95) -30.1,20.87 U2.5@-25.86,25.11 ; v1(-3.35,2.05) -3.447,2.147 -3.447,20.763 U5.5@1.053,25.263 ; v1(23.75,2.5) 23.75,21.17 U3.5@27.99,25.41
  B.Cu w0.25: v1(23.75,-10) 23.75,-10.25 22.5,-11.5 22.5,-13.431 J3.8@23.79,-14.721
  B.Cu w0.254: U9.39@-92.019,16.29 -92.019,10.519 -90.75,9.25 -83.503,2.003 -57.653,2.003 v1(-57.6,1.95) v1(-30.1,1.95) -29.993,2.057 -3.357,2.057 v1(-3.35,2.05) -3.3,2 23.25,2 v1(23.75,2.5)
A9: J3.9 U2.27 U3.27 U4.27 U5.27 U9.40 | length 243.9
  F.Cu w0.25: v1(16.25,3.21) 16.25,-9.75 v1(16.5,-10)
  F.Cu w0.254: U4.27@-68.34,27.65 -64.1,23.41 v1(-64.1,2.95) ; U2.27@-41.1,27.65 -37.6,24.15 v1(-37.6,2.95) ; U5.27@-14.187,27.803 -9.947,23.563 v1(-9.947,3.004) ; U3.27@12.75,27.95 16.25,24.45 v1(16.25,3.21)
  B.Cu w0.25: v1(16.5,-10) 17,-10.5 20.75,-10.5 21.25,-11 J3.9@21.25,-12.181
  B.Cu w0.254: U9.40@-92.019,18.83 -90.726,17.537 -90.726,10.81 -82.866,2.95 v1(-64.1,2.95) v1(-37.6,2.95) -10.001,2.95 v1(-9.947,3.004) 16.044,3.004 v1(16.25,3.21)
A10: J3.10 U2.26 U3.26 U4.26 U5.26 U9.41 | length 249.5
  F.Cu w0.25: v1(19.5,3.25) 20,2.75 20,-13.471 J3.10@21.25,-14.721
  F.Cu w0.254: U4.26@-68.34,30.19 -63.1,24.95 -63.1,4.094 v1(-63.154,4.041) ; U2.26@-41.1,30.19 -36.6,25.69 v1(-36.6,3.95) ; U5.26@-14.187,30.343 -8.947,25.103 -8.947,4.391 v1(-8.75,4.194) ; U3.26@12.75,30.49 17.25,25.99 v1(17.25,4.21)
  B.Cu w0.25: v1(17.25,4.21) 18.54,4.21 v1(19.5,3.25)
  B.Cu w0.254: U9.41@-89.479,16.29 -89.479,11.1 -87.961,9.581 -87.919,9.581 -87.919,9.539 -82.33,3.95 -63.244,3.95 v1(-63.154,4.041) -63.154,4.003 -63.1,3.95 v1(-36.6,3.95) -8.994,3.95 v1(-8.75,4.194) -8.713,4.156 17.196,4.156 v1(17.25,4.21)
A11: J3.11 U2.23 U3.23 U4.23 U5.23 U9.42 | length 279.9
  F.Cu w0.25: J3.11@18.71,-12.181 18.71,4.71 v1(19.25,5.25)
  F.Cu w0.254: U4.23@-68.34,37.81 -67.46,37.81 -61.1,31.45 v1(-61.1,4.95) ; U2.23@-41.1,37.81 -34.6,31.31 v1(-34.6,4.95) ; U5.23@-14.187,37.963 -13.307,37.963 -6.947,31.603 v1(-6.947,5.103) ; U3.23@12.75,38.11 19.25,31.61 v1(19.25,5.25)
  B.Cu w0.254: U9.42@-89.479,18.83 -88.233,17.583 -88.233,11.233 -85.419,8.419 -82.003,5.003 -61.153,5.003 v1(-61.1,4.95) v1(-34.6,4.95) -34.41,5.14 -6.984,5.14 v1(-6.947,5.103) -6.894,5.156 19.156,5.156 v1(19.25,5.25)
A12: J3.12 U2.25 U3.25 U4.25 U5.25 U9.43 | length 251.1
  F.Cu w0.25: v1(18.25,6.103) 18,5.853 18,-8.5 17.5,-9 17.5,-13.511 J3.12@18.71,-14.721
  F.Cu w0.254: U4.25@-68.34,32.73 -62.1,26.49 -62.1,6.004 v1(-62.154,5.95) ; U2.25@-41.1,32.73 -35.6,27.23 v1(-35.6,5.95) ; U5.25@-14.187,32.883 -7.947,26.643 -7.947,6.156 v1(-8.001,6.103) ; U3.25@12.75,33.03 18.25,27.53 v1(18.25,6.103)
  B.Cu w0.254: U9.43@-86.939,16.29 -86.939,11.439 -85.25,9.75 -81.503,6.004 -62.207,6.004 v1(-62.154,5.95) v1(-35.6,5.95) -8.153,5.95 v1(-8.001,6.103) -7.947,6.049 18.196,6.049 v1(18.25,6.103)